# Altium PCB c_meter.PcbDoc
Units mm, origin at the board's own origin, x right, y up, seen from the top; angles counter-clockwise.
Board outline 59 x 28 mm, 4 copper layers (Top Layer, +3.3, GND, Bottom Layer), stack 0.778 mm thick; 22 components, 10 nets, 57 pads, 13 vias.
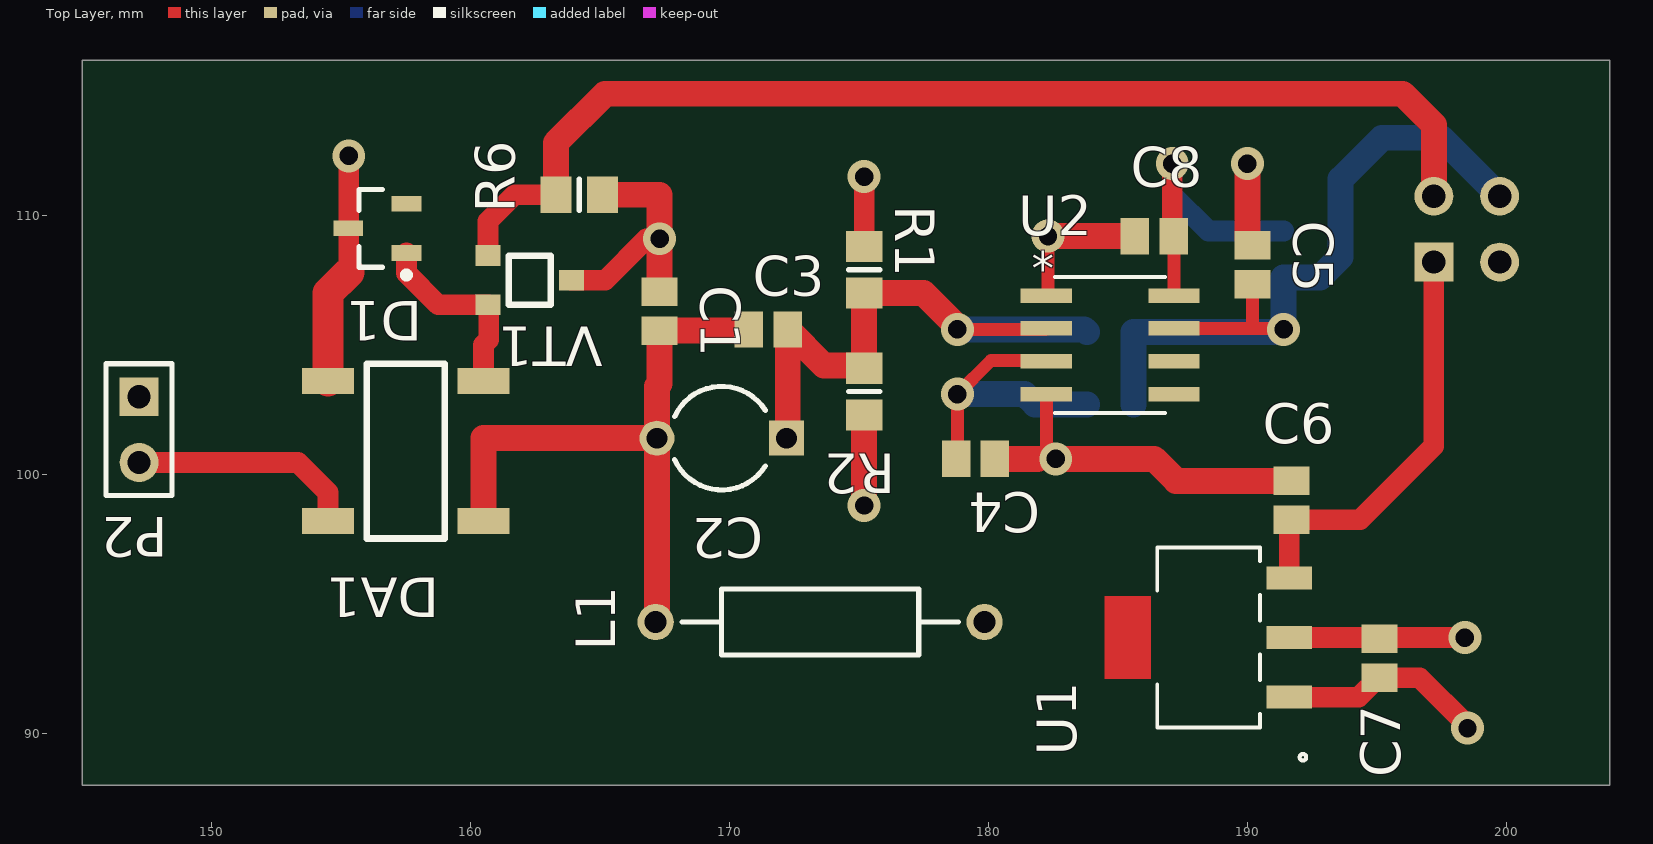
[diagram p0: Top Layer view]
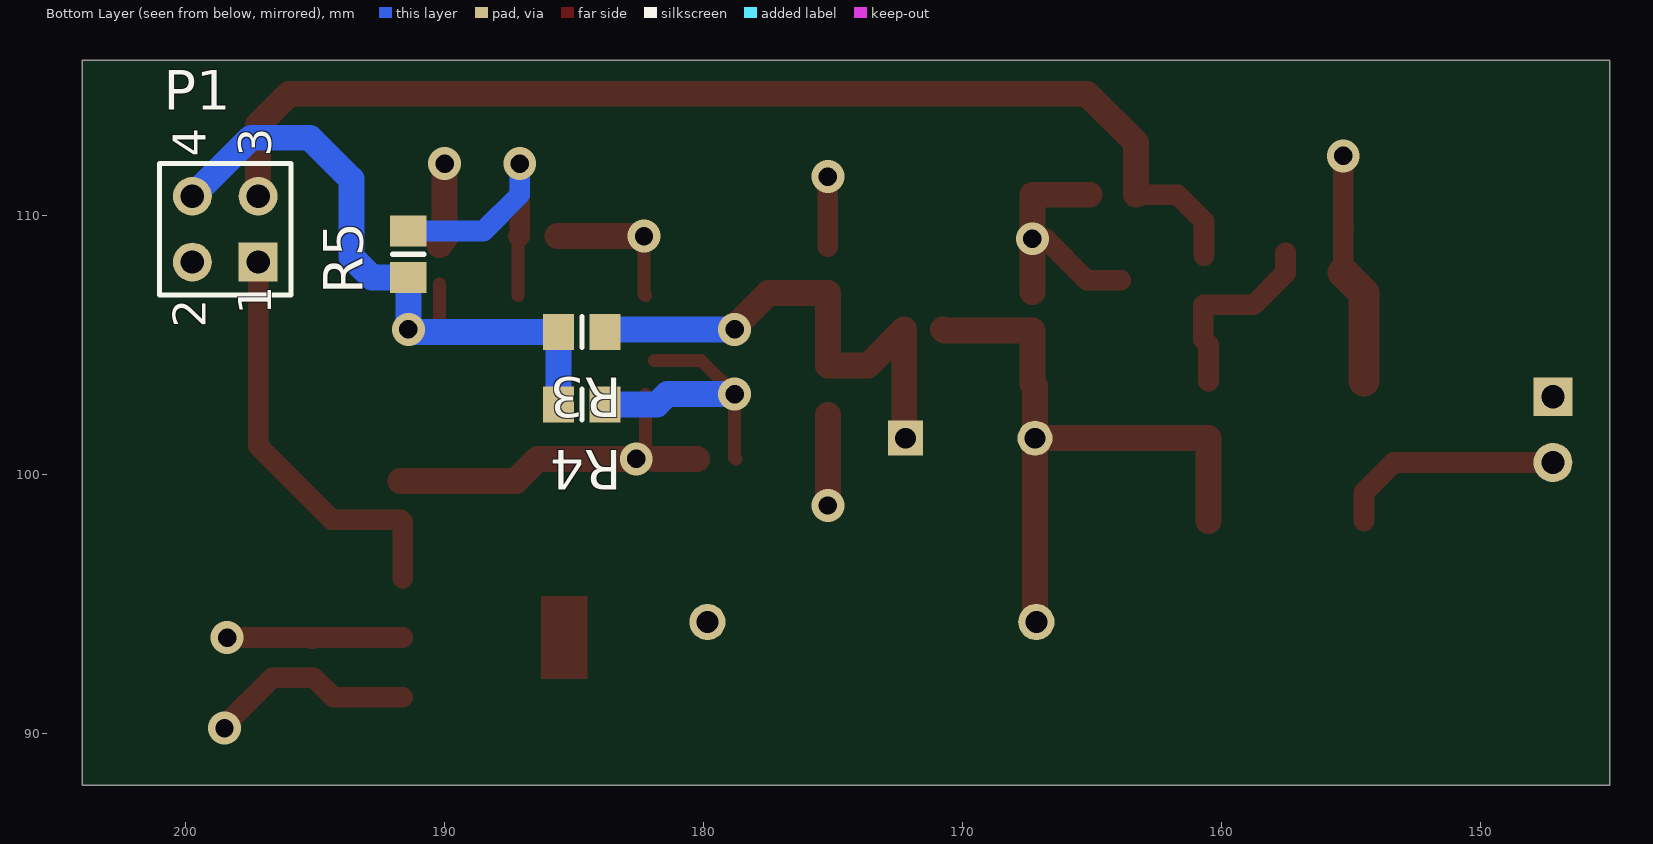
[diagram p1: Bottom Layer view, seen from below]
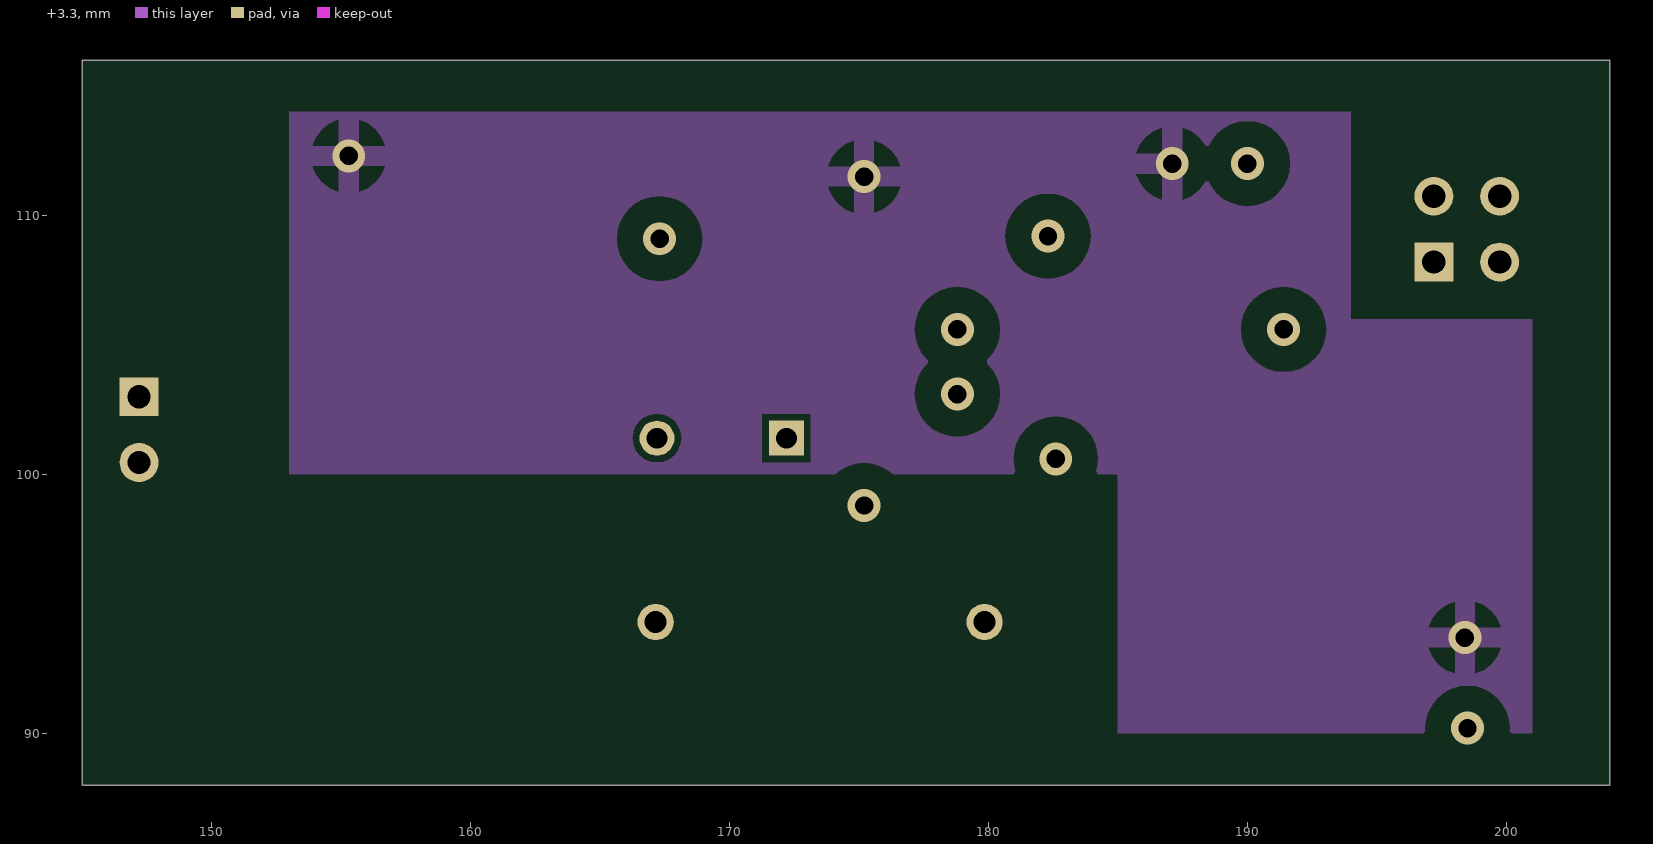
[diagram p2: +3.3]
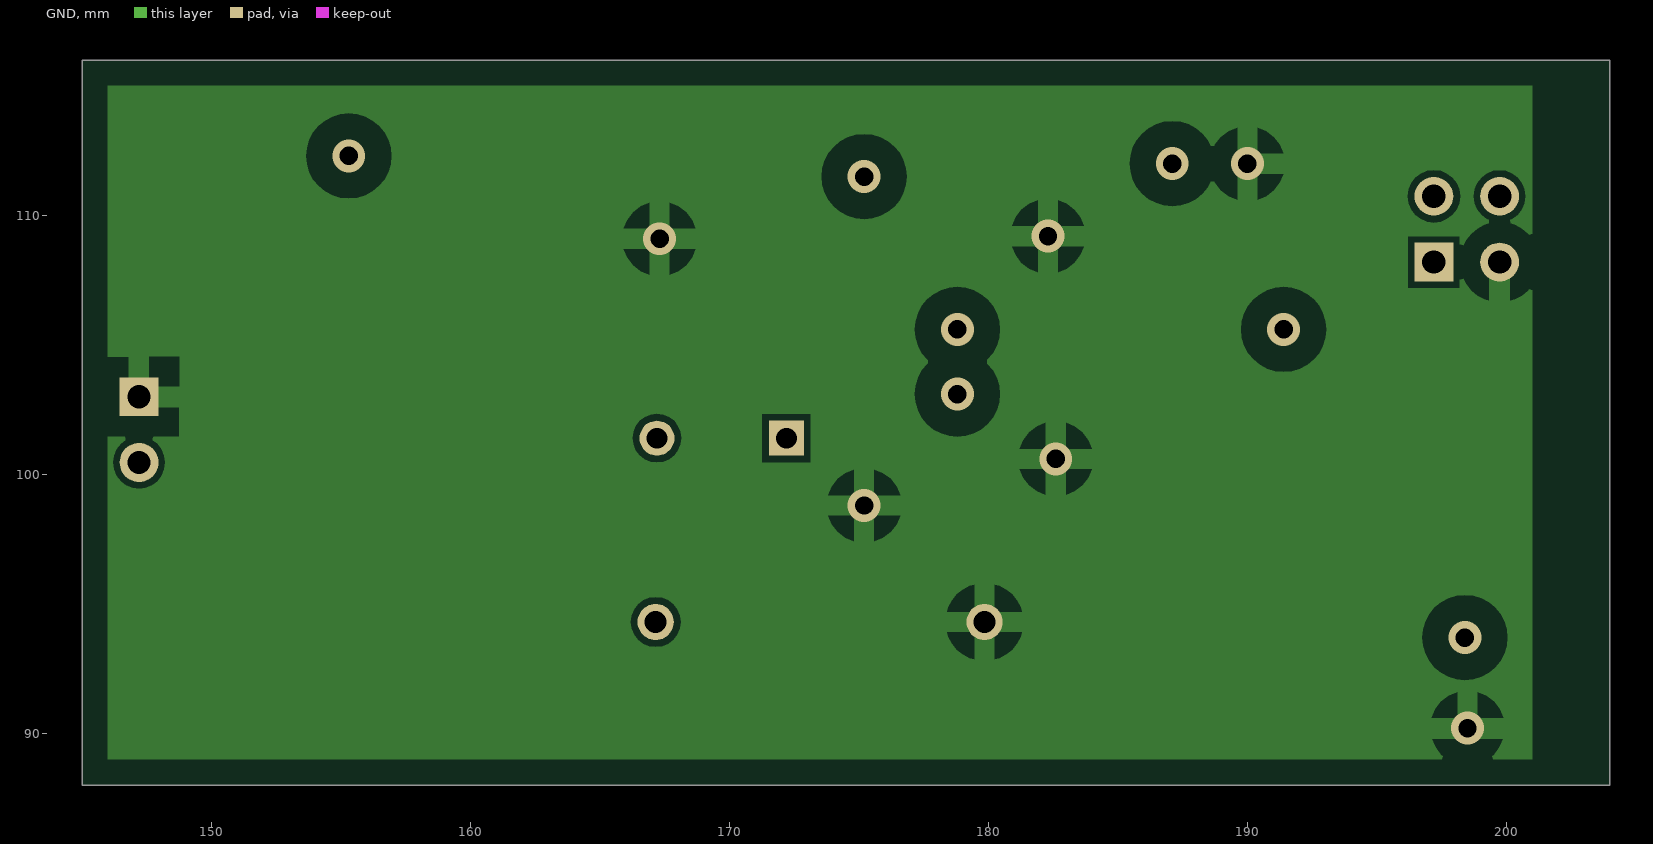
[diagram p3: GND]

## Layer stack, top to bottom
Top Solder: solder mask 0.0102, Solder Resist, Dk 3.5
Top Layer: signal copper 0.0356
Dielectric 1: core 0.254, FR-4, Dk 4.2
+3.3: signal copper 0.036
Dielectric 3: prepreg 0.127, FR-4, Dk 4.2
GND: signal copper 0.036
Dielectric 2: core 0.254, FR-4, Dk 4.2
Bottom Layer: signal copper 0.0356
Bottom Solder: solder mask 0.0102, Solder Resist, Dk 3.5

## Board outline
145,88 204,88 204,116 145,116

## Design rules (kind name [scope] priority, off if disabled: settings)
Clearance [All] p1: gap=0.254 except(1: Via-Fill Via-Poly)
PolygonConnect [All] p1: connectstyle=Relief reliefconductorwidth=0.8 reliefentries=4 polygonreliefangle="90 Angle" airgapwidth=0.8
RoutingVias [All] p1: holewidth=0.711 width=1.27 viastyle="Through Hole" minholewidth=0.711 minwidth=1.27 maxholewidth=0.711 maxwidth=1.27
SolderMaskExpansion [All] p1: expansion=0.102
Width [All] p1: maxlimit=2 minlimit=0.5 preferedwidth=1
30 further rules are at their usual default settings.

## Components (designator, comment, footprint, x,y, rotation, side; value= is the part's Value field where it differs from the comment)
C1 "Cap" C0805 167.3,106.3 r270 top
C2 "Cap Pol2" CAPR5-4X5 169.7,101.4 r180 top
C3 "Cap" C0805 171.5,105.6 r0 top
C4 "Cap" C0805 179.5,100.6 r180 top
C5 "Cap" C0805 190.2,108.1 r90 top
C6 "Cap" C0805 191.7,99 r270 top
C7 "Cap" C0805 195.1,92.9 r270 top
C8 "Cap" C0805 186.4,109.2 r0 top
D1 "Diode BAS70" SOT-23_N 156.4,109.5 r180 top
DA1 "IMB03CGR" IMB03CGR 160.5,103.6 r270 top
L1 "Inductor" AXIAL-0.5 173.5,94.3 r180 top
P1 "Header 2X2" HDR2X2 197.2,108.2 r90 bottom
P2 "Header 2" HDR1X2 147.2,103 r270 top
R1 "Res2" 6-0805_N 175.2,107.9 r90 top
R2 "Res2" 6-0805_N 175.2,103.2 r90 top
R3 "Res2" 6-0805_N 184.7,105.5 r0 bottom
R4 "Res2" 6-0805_N 184.7,102.7 r0 bottom
R5 "Res2" 6-0805_N 191.4,108.5 r90 bottom
R6 "Res2" 6-0805_N 164.2,110.8 r180 top
U1 "ADP3339AKC-3.3-R" KC_3 188.5,93.7 r90 top
U2 "LM311DR" D8 184.7,105 r0 top
VT1 "IRLML2402" IRLML2402 163.9,107.5 r270 top

## Footprints (in the part's own frame and the unit in brackets; to place one, negate y for a bottom-side part, rotate by r counter-clockwise, add the part's x,y. Pads: shape width x height; smd on the part's side, far side on the other; paste and mask are expansions set on the pad)
6-0805_N [mm] "Chip Resistor, Body 2.0x1.2mm, IPC Medium Density"
  rect 1.2x1.4 smd: 1(-0.9,0) 2(0.9,0)
  silkscreen extent 0,-0.6 0,0.6, body extent -1.07,-0.7 1.07,0.7, height 0.7
AXIAL-0.5 [mm] "Axial Device, Thru-Hole; 2 Leads; 0.5 in Pin Spacing"
  round 1.4 hole 0.85: 1(-6.35,0) 2(6.35,0)
  silkscreen extent -5.33,-1.27 5.33,1.27
C0805 [mm] "Chip Capacitor, Body 2.0x1.3mm, IPC High Density"
  rect 1.1x1.4 smd: 1(-0.75,0) 2(0.75,0)
  body extent -1.1,-0.72 1.1,0.72, height 1.4
CAPR5-4X5 [mm] "Capacitor; 2 Leads"
  rect 1.35x1.35 hole 0.8: 1(-2.5,0)
  round 1.35 hole 0.8: 2(2.5,0)
  silkscreen extent -1.69,-2 1.82,2
D8 [mil]
  rect 78x22 smd paste+0 mask+0: 1(-97,75) 2(-97,25) 3(-97,-25) 4(-97,-75) 5(97,-75) 6(97,-25) 7(97,25) 8(97,75)
  silkscreen extent -84,-103 84,104, body extent 0,0 10,10, height 10
HDR1X2 [mm] "Connector; Header; 2 Position"
  rect 1.5x1.5 hole 0.9: 1(0,0)
  round 1.5 hole 0.9: 2(2.54,0)
  silkscreen extent -1.27,-1.27 3.81,1.27
HDR2X2 [mm] "Connector; Header; 2x2 Position"
  rect 1.5x1.5 hole 0.9: 1(0,0)
  round 1.5 hole 0.9: 2(0,2.54) 3(2.54,0) 4(2.54,2.54)
  silkscreen extent -1.27,-1.27 3.81,3.81
IMB03CGR [mm] "Relay"
  rect 1x2 smd: 1(0,-6) 2(5.4,-6) 3(5.4,0) 4(0,0)
  silkscreen extent -0.67,-4.5 6.07,-1.5
IRLML2402 [mm] "Transistor"
  rect 0.802x0.972 smd: 1(-0.95,-3.228) 2(0.95,-3.228) 3(0,0)
  silkscreen extent -0.95,-2.42 0.95,-0.81
KC_3 [mil]
  rect 35x69.5 smd paste+0 mask+0: 1(-90.55,-122.75) 2(0,-122.75) 3(90.55,-122.75)
  Top Layer region: 63,88 63,157.5 -63,157.5 -63,88
  silkscreen extent -187,-148 137,78, body extent 0,0 10,10, height 10
SOT-23_N [mm] "SOT23, 3-Leads, Body 2.9x1.3mm, Pitch 0.95mm, Lead Span 2.5mm, IPC Medium Density"
  rect 1.15x0.6 smd: 1(-1.125,0.95) 2(-1.125,-0.95) 3(1.125,0)
  silkscreen extent -1.25,-1.5 0.7,1.92, body extent -0.7,-1.5 0.7,1.5, height 1.1

## Part data
C1 C3 C4 C5 C6 C7 C8: "Capacitor"
C2: "Polarized Capacitor (Axial)"
D1: "Silicon AF Schottky Diode for High-Speed Switching"
DA1: "Relay"
P1: "Header, 2-Pin, Dual row"
P2: "Header, 2-Pin"
R1 R2 R3 R4 R5 R6: "Resistor"
U1 U2: "Imported"
VT1: "Voltage Source"

## Via types
v1: diameter 1.27, hole 0.711, Top Layer to Bottom Layer, 13 vias

## Nets (pads, with @x,y where several pads share a name; then routed paths per layer and width w, separated by ;. In a path a pad name is that pad's centre, name@x,y a point inside that pad or via, vN(x,y) a via of type N, cw(c..) or ccw(c..) an arc to the next point about the centre after c; other vN are vias at no path point)
3.3_MAX10: C6.2 P1.1 U1.3 | length 16.1
  Top Layer w0.8: U1.3 191.618,98.168 C6.2 194.35,98.25 197.2,101.1 P1.1
+3.3: C7.1 C8.2 D1.3 DA1.1 R1.2 R5.2 U1.2 U2.8 | length 29.7
  Top Layer w0.5: C8.2 187.164,109.186 U2.8
  Top Layer w0.8: 155.3,107.8 155.3,109.475 D1.3 155.3,109.525 v1(155.3,112.3) ; R1.2 v1(175.2,111.5) ; v1(187.1,112) 187.1,109.2 C8.2 ; U1.2 C7.1@195.05,93.7 ; C7.1 195.15,93.7 v1(198.4,93.7)
  Top Layer w1.2: DA1.1 154.5,107 155.3,107.8
  Bottom Layer w0.8: v1(187.1,112) 187.1,110.8 188.5,109.4 R5.2
GND: C1.1 C4.1 C5.2 C6.1 C7.2 C8.1 L1.1 P1.2 P2.1 R2.1 R6.1 U1.1 U2.1 U2.4 VT1.3 | length 43.3
  Top Layer w0.5: U2.4 182.236,100.964 v1(182.6,100.6) ; U2.1 182.3,106.969 v1(182.3,109.2)
  Top Layer w0.8: VT1.3 165.2,107.5 v1@166.8,109.1 ; U1.1 194.3,91.4 C7.2@195.05,92.15 ; C7.2 196.65,92.15 v1@198.5,90.3
  Top Layer w1: R6.1 167.3,110.8 v1(167.3,109.1) ; C1.1 v1@167.3,108.8 ; v1(175.2,98.8) R2.1 ; C4.1 181.9,100.6 ; v1(182.3,109.2) C8.1 ; v1(182.6,100.6) 186.4,100.6 187.25,99.75 C6.1 ; v1(190,112) 190,109.1 190.2,108.9 C5.2
  other v1: 198.5,90.2
NetC1_2: C1.2 C2.2 C3.1 DA1.3 L1.2 | length 24.7
  Top Layer w1: DA1.3 160.5,101.4 C2.2 ; L1.2 167.2,94.35 C2.2 ; C3.1 170.7,105.55 C1.2 167.3,103.5 167.2,103.4 C2.2
NetC2_1: C2.1 C3.2 R1.1 R2.2 R3.1 U2.2 | length 23.3
  Top Layer w0.5: v1(178.8,105.6) 182.201,105.6 U2.2
  Top Layer w1: C2.1 172.25,101.45 C3.2 173.65,104.2 175.2,104.2 R1.1 177.5,107 178.8,105.7 v1(178.8,105.6)
  Bottom Layer w1: v1(178.8,105.6) 183.7,105.6 R3.1
NetC4_2: C4.2 R4.1 U2.3 | length 11.3
  Top Layer w0.5: C4.2 178.8,100.65 v1(178.8,103.1) 180.1,104.4 U2.3@181.9,104.4
  Bottom Layer w1: v1(178.8,103.1) 181.4,103.1 181.8,102.7 R4.1
NetD1_1: D1.1 DA1.4 VT1.2 | length 7.5
  Top Layer w0.8: D1.1 157.525,107.775 158.75,106.55 VT1.2 160.7,106.522 160.7,105.2 160.5,105 DA1.4
NetDA1_2: DA1.2 P2.2 | length 8.9
  Top Layer w0.8: P2.2 153.34,100.46 154.5,99.3 DA1.2
OUT: C5.1 P1.4 R3.2 R4.2 R5.1 U2.7 | length 29.8
  Top Layer w0.5: U2.7 v1@191.365,105.635 ; 190.2,105.635 C5.1
  Bottom Layer w1: R4.2 R3.2 191.3,105.5 v1(191.4,105.6) R5.1 192.8,107.6 193.6,108.4 193.6,111.4 195.2,113 197.48,113 P1.4
RELAY_CTRL: P1.3 R6.2 VT1.1 | length 44.3
  Top Layer w0.8: VT1.1 160.672,109.772 161.7,110.8 R6.2
  Top Layer w1: R6.2 163.3,112.8 165.2,114.7 196,114.7 197.2,113.5 P1.3
pads on no net: D1.2 U2.5 U2.6

## Polygon pours and split planes (outlines as drawn)
+3.3 on +3.3 "+3.3" (solid, pour order 30): 201,90 201,106 194,106 194,114 153,114 153,102 153,100 185,100 185,90 201,90
GND on GND "GND" (solid, pour order 26): 201,115 146,115 146,89 201,89 201,115

## Silkscreen, mask and mechanical layers (free items; w line width, h text height)
Board:
  the board outline again, w1.2

## Text inside footprints (layer, text, board x,y; h text height)
P1: Bottom Overlay "1" at 196.692,106.168 h1.27 r270; Bottom Overlay "2" at 199.232,105.66 h1.27 r270; Bottom Overlay "4" at 199.232,112.264 h1.27 r270; Bottom Overlay "3" at 196.692,112.264 h1.27 r270
U2: Top Overlay "*" at 181.665,107.337 h1.27; Mechanical 13 "*" at 182.77,106.156 h1.27